# EAGLE board Schematic circuit (EAGLE 9.7.0)

Size 177.18 x 87.48 mm. Coordinates in mm from the lower left corner, seen from the top.
Outline: 0,0 177.18,0 177.18,87.48 0,87.48 0,0
Copper layers (1*16): Top 0.035mm / dielectric 1.5mm / Bottom 0.035mm
Design rules "default": minimum track width 6mil, minimum drill 0.35mm, track to track 6mil, track to pad 6mil, pad to pad 6mil, via to via 6mil, smd to smd 6mil, copper to edge 40mil, drill to drill 6mil, minimum pad ring 10mil, minimum via ring 8mil, stop-mask expansion 4mil, vias tented up to drill 0mil, thermal gap 10mil

## Footprints (pad centres in the part's own frame; a part is rotated, then mirrored left to right if it is on the bottom)
WS2812-STRIP = drill 1.016 long: 1 -3.81,0; 2 -1.27,0; 3 1.27,0; 4 3.81,0
BATTERY-GENERIC = drill 1.118 pad 3.15 octagon: + 2.54,0; - -2.54,0
DIP787W55P254L958H533Q8B-8P3 = drill 0.852 pad 1.452: 1 -3.81,3.81; 2 -3.81,1.27; 3 -3.81,-1.27; 4 -3.81,-3.81; 5 3.81,-3.81; 6 3.81,-1.27; 7 3.81,1.27; 8 3.81,3.81

## Placement (x,y rotation side)
LED1  WS2812B_STRIP  [WS2812-STRIP]  36.67,79.15 270 top
LED2  WS2812B_STRIP  [WS2812-STRIP]  168.92,8.33 90 top
P1  BATTERYGENERIC  [BATTERY-GENERIC]  8.26,51.71 180 top
RING1  WS2812B_STRIP  [WS2812-STRIP]  145.81,46.66 180 top
U1  ATtiny25-20PU  [DIP787W55P254L958H533Q8B-8P3]  59.46,44.85 90 top

## Library data of the parts
LED1 LED2 P1 RING1 = Tinkercad
U1 = Tinkercad; CATEGORY: IC_Embedded; CORE: AVR; DESCRIPTION: AVR AVR® ATtiny, Functional Safety (FuSa) Microcontroller IC 8-Bit 20MHz 2KB (1K x 16) FLASH 8-PDIP; MANUFACTURER: Microchip Technology; MPN: ATtiny25-20PU; OPERATING_TEMP: -40°C to 85°C; PART_STATUS: Active; ROHS_COMPLIANT: COMPLIANT; SERIES: ATtiny25; SPEED: 20 MHz; SUB-CATEGORY: Microcontroller; TYPE: AVR Microcontroller

## Nets
P1+: LED1.2 LED2.2 P1.+ RING1.2 U1.8
P1-: LED1.3 LED2.3 P1.- RING1.3 U1.4
RING1_DIN: LED1.4 RING1.1
RING1_DOUT: LED2.1 RING1.4
U1_PB2: LED1.1 U1.7

## Tracks (layer width: path | path; a pad name or v marks a point on that pad's centre or on a via)
P1+  (4 unrouted)
P1-  (4 unrouted)
RING1_DIN  (1 unrouted)
RING1_DOUT  (1 unrouted)
U1_PB2  (1 unrouted)